# Altium PCB DASHBOARD.PcbDoc (part 2 of 2)
Units mm, origin at the board's own origin, x right, y up, seen from the top; angles counter-clockwise.
Board outline 200 x 60 mm, 2 copper layers (Top Layer, Bottom Layer); 94 components, 71 nets, 344 pads, 49 vias.
Unrouted connection lines stored in the file: 10.
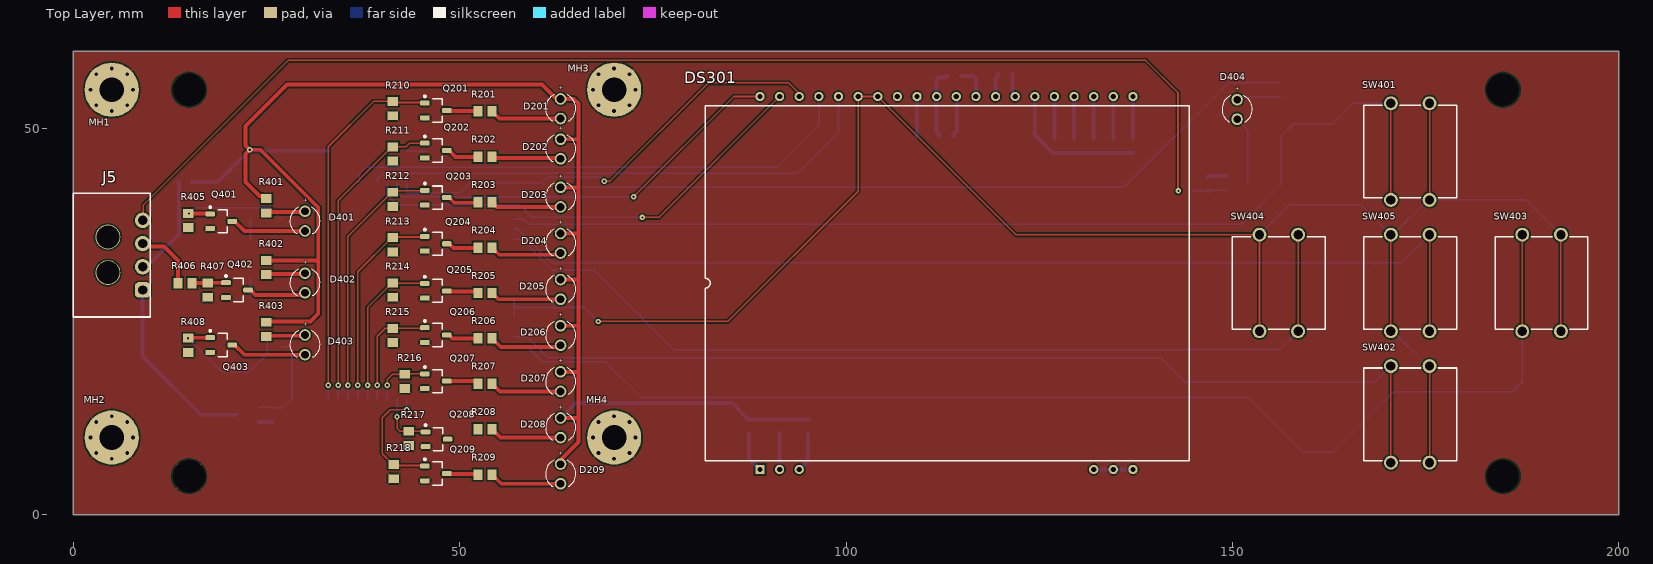
[diagram p0: Top Layer view]

## Via types
v1: diameter 0.7, hole 0.5, Top Layer to Bottom Layer, 32 vias
v2: diameter 0.7, hole 0.3, Top Layer to Bottom Layer, 16 vias
v3: diameter 0.7, hole 0.3, Top Layer to Bottom Layer, tented both sides, 1 vias

## Nets (pads, with @x,y where several pads share a name; then routed paths per layer and width w, separated by ;. In a path a pad name is that pad's centre, name@x,y a point inside that pad or via, vN(x,y) a via of type N, cw(c..) or ccw(c..) an arc to the next point about the centre after c; other vN are vias at no path point) (continued)
NetD207_K: (continued)
  Top Layer w0.5: R207.2 54.218,16.854 54.543,16.529 54.643,16.529 55.211,15.961 D207.K
NetD208_K: D208.K R208.2 | length 9.4
  Top Layer w0.5: R208.2 54.218,10.981 54.543,10.656 54.643,10.656 55.307,9.992 D208.K
NetD209_K: D209.K R209.2 | length 9.3
  Top Layer w0.5: R209.2 55.402,4.023 D209.K
NetD401_A: D401.A R401.2 | length 5.1
  Top Layer w0.5: R401.2 25.098,39.172 29.903,39.172 D401.A
NetD401_K: D401.K Q401.D | length 9.9
  Top Layer w0.5: Q401.D 20.888,37.983 22.158,36.713 D401.K@30,36.713
NetD402_A: D402.A R402.2 | length 5.1
  Top Layer w0.5: R402.2 25.098,31.173 29.903,31.173 D402.A
NetD402_K: D402.K Q402.D | length 7.7
  Top Layer w0.5: Q402.D 22.709,29.008 23.009,29.008 23.569,28.448 29.447,28.448 29.729,28.73 D402.K
NetD403_A: D403.A R403.2 | length 5.1
  Top Layer w0.5: R403.2 25.098,23.173 29.903,23.173 D403.A
NetD403_K: D403.K Q403.D | length 9.9
  Top Layer w0.5: Q403.D 20.888,21.983 22.158,20.713 D403.K@30,20.713
NetD404_A: D404.A R404.2 | length 5.8
  Bottom Layer w0.2: D404.A 150.958,53.721 151.303,54.066 R404.2 ; R404.2@156.285,54.102 R404.2@156.321,54.066
NetD404_K: D404.K Q404.D | length 8.8
  Bottom Layer w0.2: D404.K 151.987,49.8 151.987,42.97 Q404.D
NetDS301_1: DS301.1 R303.1 | length 5.2
  Bottom Layer w0.5: R303.1 87.455,7.285 DS301.1
NetDS301_2: DS301.2 R302.1 | length 4.6
  Bottom Layer w0.5: R302.1 91.401,10.496 91.401,5.879 DS301.2
NetDS301_3: DS301.3 R301.1 | length 5.1
  Bottom Layer w0.5: DS301.3 95.075,6.995 R301.1
NetQ201_D: Q201.D R201.1 | length 4.1
  Top Layer w0.5: Q201.D 48.424,52.26 52.304,52.26 R201.1
NetQ202_D: Q202.D R202.1 | length 4.3
  Top Layer w0.5: Q202.D 48.66,47.142 49.478,46.323 R202.1
NetQ203_D: Q203.D R203.1 | length 4.3
  Top Layer w0.5: Q203.D 48.66,41.046 49.32,40.386 52.305,40.386 R203.1
NetQ204_D: Q204.D R204.1 | length 4.2
  Top Layer w0.5: Q204.D 48.66,35.077 49.193,34.544 52.336,34.544 R204.1
NetQ205_D: Q205.D R205.1 | length 4.1
  Top Layer w0.5: Q205.D 48.435,28.905 52.164,28.905 R205.1
NetQ206_D: Q206.D R206.1 | length 4.2
  Top Layer w0.5: Q206.D 48.66,23.266 49.097,22.828 R206.1
NetQ207_D: Q207.D R207.1 | length 4.2
  Top Layer w0.5: Q207.D 52.043,17.297 52.368,16.972 R207.1
NetQ208_D: Q208.D R208.1 | length 0.3
  Top Layer w0.5: Q208.D Q208.D@48.528,9.708 ; R208.1@52.196,11.252 R208.1
NetQ209_D: Q209.D R209.1 | length 4.1
  Top Layer w0.5: Q209.D 48.435,5.283 52.292,5.283 R209.1
NetQ402_G: Q402.G R406.2 R407.2 | length 4.4
  Top Layer w0.5: R406.2 15.439,30.008 R407.2 17.424,30.033 Q402.G
NetQ404_G: Q404.G R409.1 R417.2 | length 4.4
  Bottom Layer w0.2: R417.2 146.819,41.91 146.837,41.892 146.921,41.976 Q404.G
  Bottom Layer w0.5: R409.1@146.921,41.892 R409.1
OK_BUTTON: D409.1 J1.26 R414.1 SW405.B1 SW405.B2 | length 134.3
  Top Layer w0.2: SW405.B1 SW405.B2
  Bottom Layer w0.2: J1.26 57.53,36.985 57.8,36.715 61.876,32.639 168.184,32.639 R414.1 ; R414.1@168.402,32.639 171.889,32.639 SW405.B2
RIGHT_BUTTON: D407.1 R412.1 SW403.B1 SW403.B2 | length 159.1
  Top Layer w0.2: SW403.B2 SW403.B1
  Bottom Layer w0.2: 57.05,21.745 58.773,21.745 60.706,19.812 68.834,19.812 73.406,15.24 151.892,15.24 159.004,8.128 163.068,8.128 170.851,15.911 181.356,15.911 D407.1@181.373,15.928 ; D407.1@181.322,15.911 D407.1 181.39,15.911 R412.1 185.437,15.928 186.278,15.928 187.5,17.15 SW403.B2 ; SW403.B1@187.436,36.322 187.5,36.258 SW403.B1
RST_LCD: DS301.39 J4.16 | length 60
  Top Layer w0.2: v2(73.66,38.481) 75.761,38.481 DS301.39
  Bottom Layer w0.2: J4.16 40.635,41.407 41.91,40.132 57.785,40.132 59.436,38.481 v2(73.66,38.481)
SC_END_LED: J5.4 R417.1 | length 158.5
  Top Layer w0.2: J5.4@9.1,37.719 9.1,40.088 27.812,58.8 138.764,58.8 142.954,54.61 142.954,41.965 v2(143.009,41.91)
  Bottom Layer w0.2: R417.1@142.877,41.892 R417.1@142.895,41.91
  Bottom Layer w0.5: R417.1@142.859,41.91 R417.1@142.877,41.892
SI_LCD: DS301.36 J4.14 | length 67.3
  Bottom Layer w0.2: J4.14 39.365,43.418 40.143,44.196 93.726,44.196 99.03,49.5 DS301.36
TS_OFF: J5.3 R406.1 | length 8.2
  Top Layer w0.5: J5.3@9.1,34.719 11.763,34.719 13.553,32.929 R406.1
UP_BUTTON: D405.1 J1.28 R410.1 SW401.B1 SW401.B2 | length 136.5
  Top Layer w0.2: SW401.B2 SW401.B1
  Bottom Layer w0.2: J1.28 58.265,38.255 58.928,37.592 151.13,37.592 156.337,42.799 156.337,49.022 157.918,50.603 D405.1 163.018,50.603 165.144,52.729 165.144,52.829 165.619,53.304 R410.1 165.773,53.25 SW401.B1
V+_BUZZER: J5.2 R416.1 | length 13.3
  Bottom Layer w0.5: J5.2@9.1,31.719 13.68,36.299 13.68,42.926 R416.1@13.553,43.053
V-_BUZZER: J5.1 Q405.D | length 23.9
  Bottom Layer w0.5: J5.1 9,20.464 16.51,12.954 Q405.D
pads on no net: J1.1 J1.2 J1.3 J1.4 J1.5 J1.6 J1.7 J1.9 J1.11 J1.13 J1.14 J1.15 J1.17 J1.19 J1.21 J1.23 J1.25 J1.27 J2.2 J2.3 J2.4 J2.5 J2.6 J2.7 J2.8 J2.9 J2.11 J2.12 J2.17 J2.19 J2.21 J2.22 J2.28 J3.1 J3.2 J3.3 J3.6 J3.8 J3.10 J3.12 J3.14 J3.16 J3.17 J3.18 J3.19 J3.20 J3.21 J3.22 J3.24 J3.26 J4.2 J4.4 J4.6 J4.7 J4.8 J4.9 J4.11 J4.12 J4.13 J4.15 J4.17 J4.19 J4.21 J4.22 J4.23 J4.24 J4.25 J4.26 J4.27 J5.
copper on no net: | length 43.6
  Top Layer w0.2: v2(35.56,16.764) 35.555,16.769 35.555,36.045 41.255,41.745 41.355,41.745 ; 41.53,41.921 45.435,41.921 ; v3(41.91,12.7) 41.91,11.208 42.307,10.811 45.529,10.811
  Top Layer w0.5: 41.355,41.745 41.53,41.921 ; 45.435,41.921 45.51,41.996
  Bottom Layer w0.2: 35.555,15.05 35.56,15.055 v2(35.56,16.764) ; v3(41.91,12.7) 41.91,15.05 ; 43.175,47.05 44.445,47.05 45.715,47.05

## Polygon pours and split planes (outlines as drawn)
GND on Bottom Layer "GND_L02_P005" (solid, pour order 5): 0,0 0,60 200,60 200,0
GND on Top Layer "GND_L01_P003" (solid, pour order 3): 0,0 0,60 200,60 200,0

## Silkscreen, mask and mechanical layers (free items; w line width, h text height)
Bottom Overlay:
  drawing of 32 lines, arcs and shapes, not listed
  text "Dashboard 2023-24" at 122.123,22.987 h3
  text "Guillem Ropero & Andreu Senis" at 124.791,20.459 h2.5
Mechanical 1:
  the board outline again, w0.5

## Text inside footprints (layer, text, board x,y; h text height)
D201: Top Overlay "+" at 62.722,55.487 h0.8 r270
D202: Top Overlay "+" at 62.722,50.28 h0.8 r270
D203: Top Overlay "+" at 62.722,44.057 h0.8 r270
D204: Top Overlay "+" at 62.722,38.088 h0.8 r270
D205: Top Overlay "+" at 62.722,32.119 h0.8 r270
D206: Top Overlay "+" at 62.722,26.15 h0.8 r270
D207: Top Overlay "+" at 62.722,20.181 h0.8 r270
D208: Top Overlay "+" at 62.722,14.212 h0.8 r270
D209: Top Overlay "+" at 62.722,8.243 h0.8 r270
D401: Top Overlay "+" at 29.65,40.95 h0.8 r270
D402: Top Overlay "+" at 29.65,32.95 h0.8 r270
D403: Top Overlay "+" at 29.65,24.95 h0.8 r270
D404: Top Overlay "+" at 150.256,55.401 h0.8 r270
J1: Bottom Overlay "28" at 57,39.02 h1.02 r270; Bottom Overlay "27" at 52,39.02 h1.02 r270; Bottom Overlay "1" at 52,20.68 h1.02 r270; Bottom Overlay "2" at 57,20.28 h1.02 r270
J2: Bottom Overlay "2" at 49.72,15 h1.02; Bottom Overlay "1" at 49.32,10 h1.02; Bottom Overlay "27" at 30.98,10 h1.02; Bottom Overlay "28" at 30.98,15 h1.02
J3: Bottom Overlay "28" at 27,39.02 h1.02 r270; Bottom Overlay "27" at 22,39.02 h1.02 r270; Bottom Overlay "1" at 22,20.68 h1.02 r270; Bottom Overlay "2" at 27,20.28 h1.02 r270
J4: Bottom Overlay "28" at 49.02,43 h1.02 r180; Bottom Overlay "27" at 49.02,48 h1.02 r180; Bottom Overlay "1" at 30.68,48 h1.02 r180; Bottom Overlay "2" at 30.28,43 h1.02 r180